# EAGLE board SmartLEDShield_V4 (EAGLE 7.7.0)
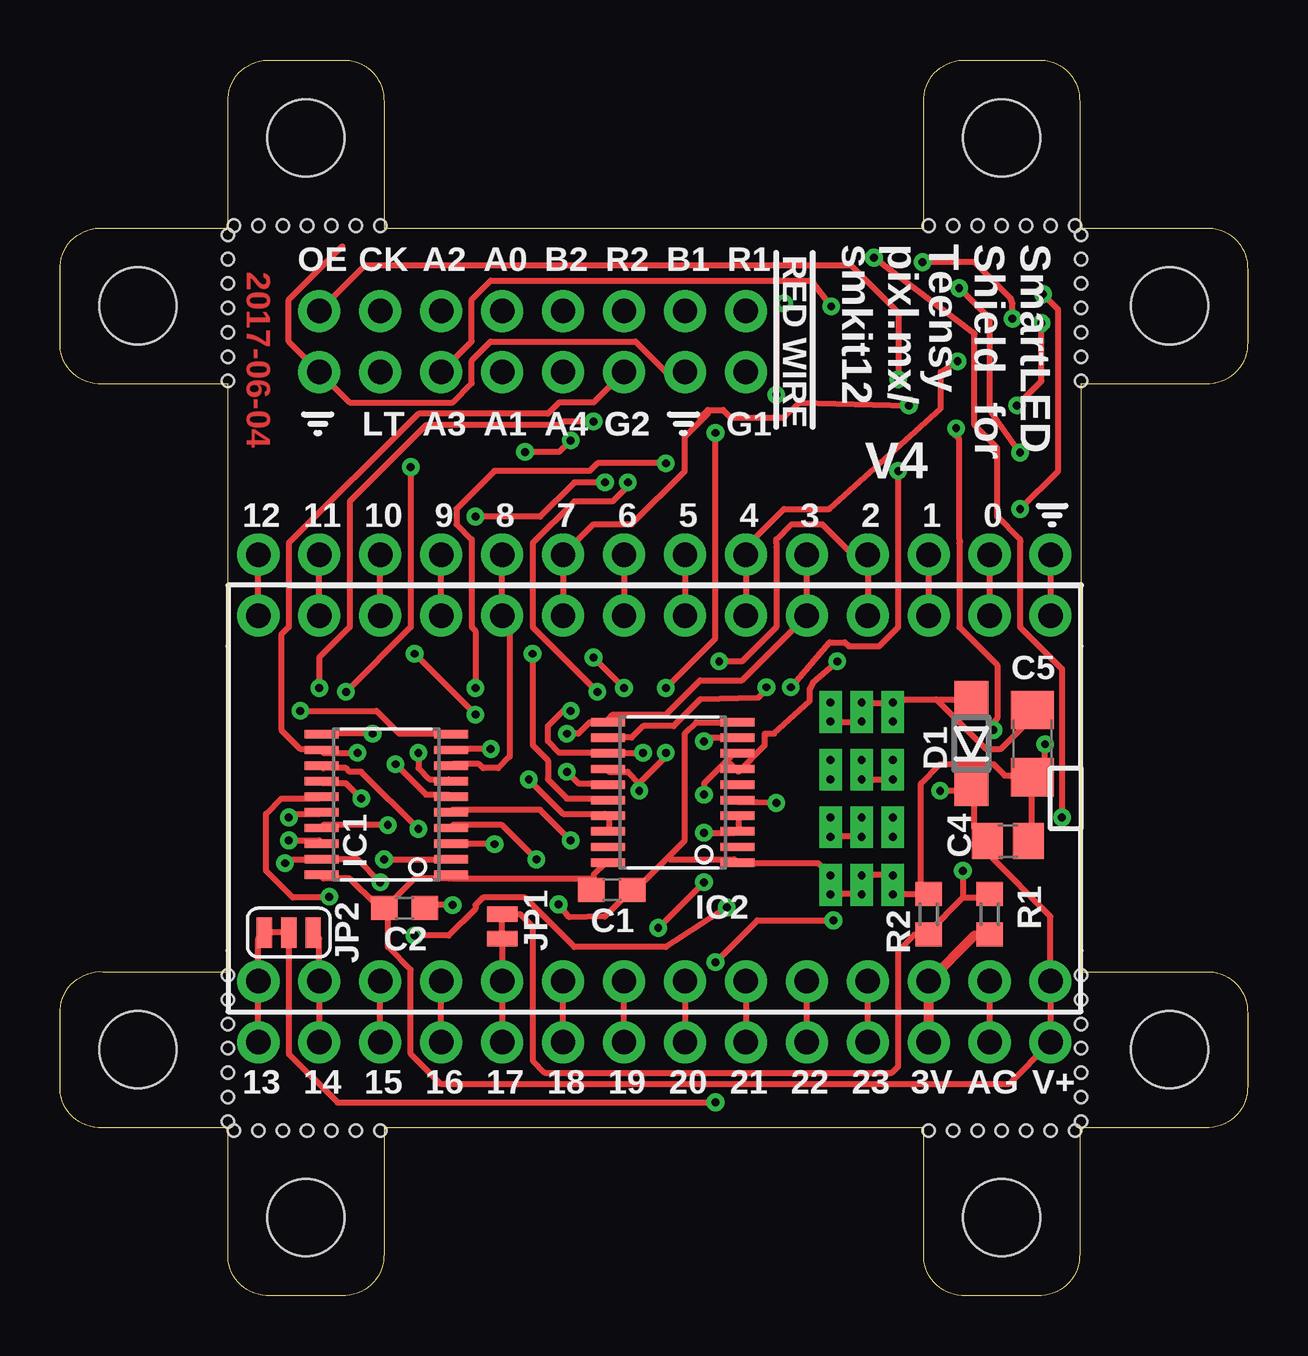
[diagram p0: board, top side]
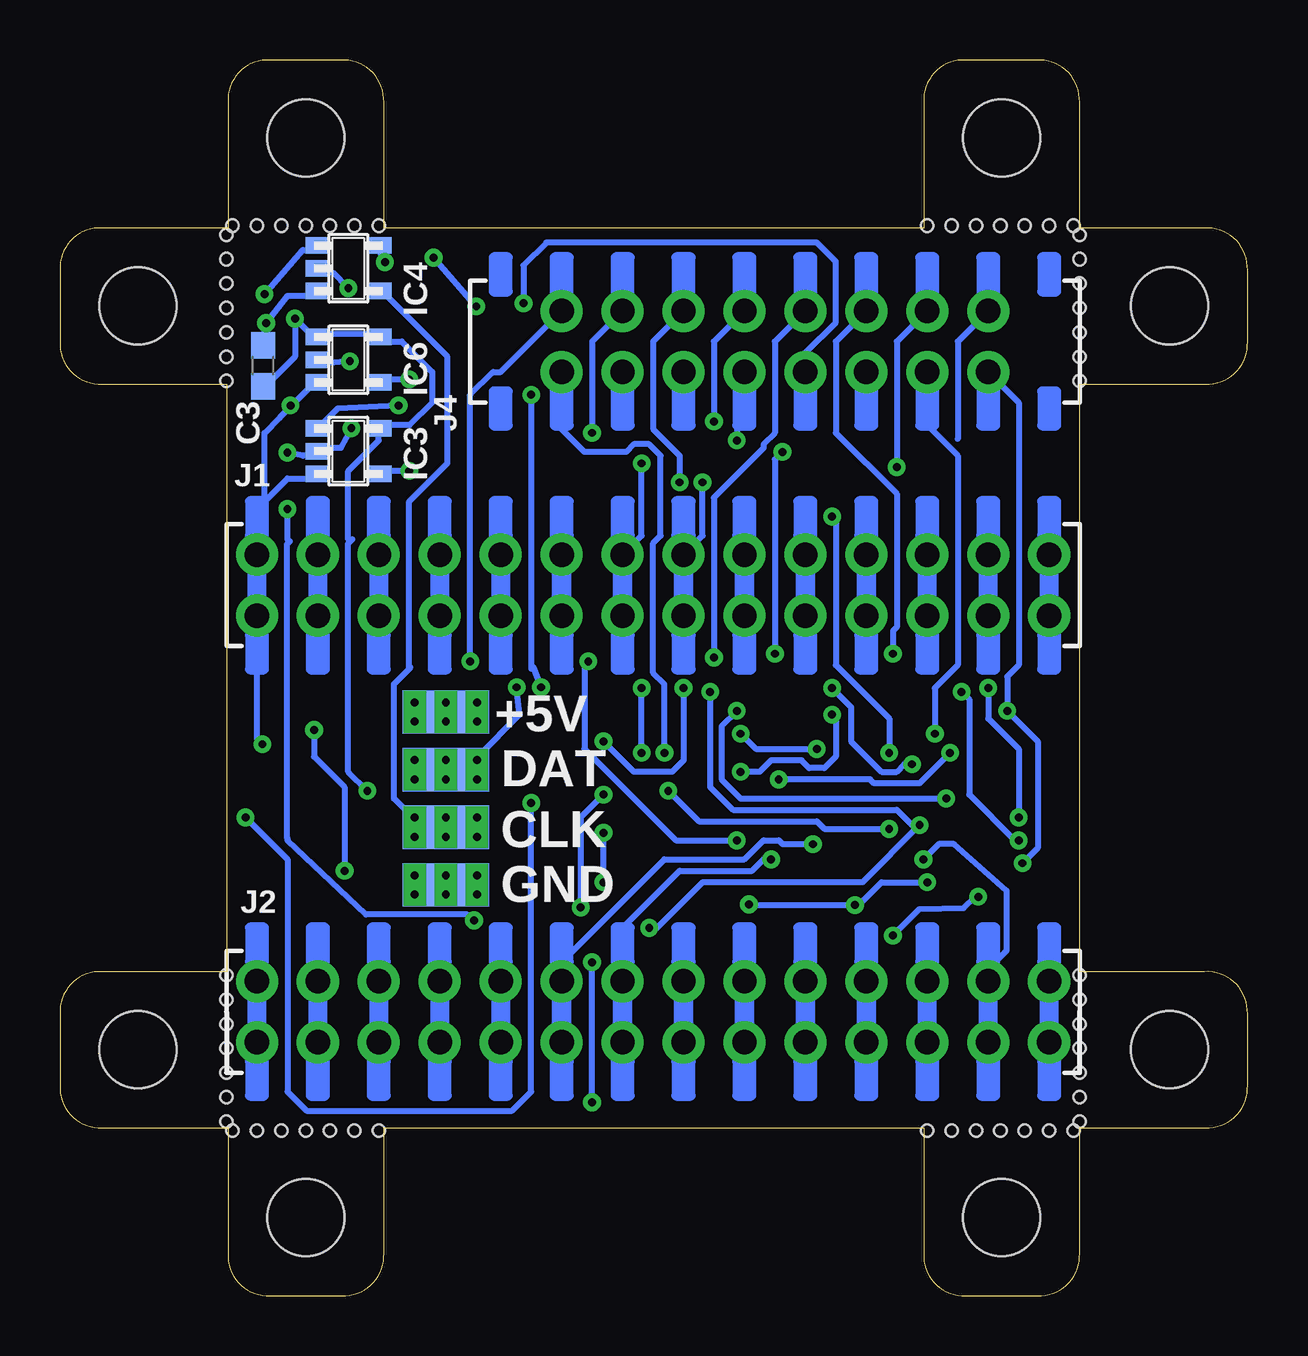
[diagram p1: board, bottom side, seen from below]

Size 49.5 x 51.5 mm. Coordinates in mm from the lower left corner, seen from the top.
Outline: 13.5,44.5 36,44.5 36,49.75 arc-95 37.8,51.5 40.75,51.5 arc-95 42.5,49.75 42.5,44.5 47.75,44.5 arc-95 49.5,42.75 49.5,39.75 arc-95 47.75,38 42.56,38 42.56,13.5 47.75,13.5 arc-95 49.5,11.75 49.5,8.75 arc-95 47.75,7 42.5,7 42.5,1.75 arc-95 40.75,0 37.75,0 arc-95 36,1.75 36,7 13.5,7 13.5,1.75 arc-95 11.75,0 8.75,0 arc-95 7,1.75 7,7 1.75,7 arc-95 0,8.75 0,11.75 arc-95 1.8,13.5 7,13.5 7,38 1.75,38 arc-95 0,39.75 0,42.75 arc-95 1.8,44.5 7,44.5 7,49.75 arc-95 8.8,51.5 11.75,51.5 arc-95 13.5,49.75 13.5,44.5
Copper layers (1*16): Top 0.0356mm / dielectric 1.5011mm / Bottom 0.0356mm
Design rules "OshParkMod-8mil-20150316": minimum track width 6mil, minimum drill 13mil, track to track 8mil, track to pad 8mil, pad to pad 8mil, via to via 8mil, smd to smd 8mil, copper to edge 15mil, drill to drill 6mil, minimum pad ring 12mil, minimum via ring 8mil, stop-mask expansion 3mil, vias tented up to drill 25mil, thermal gap 10mil
Net classes: 0 default: width 0.254 mm; 1 power: width 0.406 mm
Holes 0.51 mm at 42.56,44.22 42.56,43.2 42.56,42.18 42.56,41.17 42.56,40.15 42.56,39.13 42.56,38.12 36.21,44.6 37.23,44.6 38.24,44.6 39.26,44.6 40.27,44.6 41.29,44.6 42.31,44.6 7.25,44.6 8.27,44.6 9.29,44.6 10.3,44.6 11.32,44.6 12.33,44.6 13.35,44.6 7,38.12 7,39.13 7,40.15 7,41.17 7,42.18 7,43.2 7,44.22 7,7.26 7,8.27 7,9.29 7,10.31 7,11.32 7,12.34 7,13.35 13.35,6.88 12.33,6.88 11.32,6.88 10.3,6.88 9.29,6.88 8.27,6.88 7.25,6.88 42.31,6.88 41.29,6.88 40.27,6.88 39.26,6.88 38.24,6.88 37.23,6.88 36.21,6.88 42.56,13.35 42.56,12.34 42.56,11.32 42.56,10.31 42.56,9.29 42.56,8.27 42.56,7.26

## Footprints (pad centres in the part's own frame; a part is rotated, then mirrored left to right if it is on the bottom)
C0603 = smd 1.1 x 1: 1 -0.85,0; 2 0.85,0
C0805 = smd 1.3 x 1.5: 1 -0.85,0; 2 0.85,0
C1206 = smd 1.6 x 1.8: 1 -1.4,0; 2 1.4,0
SOD123 = smd 1.4 x 1.4: A 1.9,0; C -1.9,0
STAND-OFF-3MM = hole 3.2: 0,0
TSSOP-20 = smd 0.35 x 1.43: 1 -2.925,-2.7; 2 -2.275,-2.7; 3 -1.625,-2.7; 4 -0.975,-2.7; 5 -0.325,-2.7; 6 0.325,-2.7; 7 0.975,-2.7; 8 1.625,-2.7; 9 2.275,-2.7; 10 2.925,-2.7; 11 2.925,2.7; 12 2.275,2.7; 13 1.625,2.7; 14 0.975,2.7; 15 0.325,2.7; 16 -0.325,2.7; 17 -0.975,2.7; 18 -1.625,2.7; 19 -2.275,2.7; 20 -2.925,2.7
SOT23-5 = smd 0.69 x 0.99: 1 -0.95,-1.29; 2 0,-1.29; 3 0.95,-1.29; 4 0.95,1.3; 5 -0.95,1.3
TEENSY_DUAL_HEADER_BOT_MOUNT_LEFT = drill 1.016 pad 1.753: 0A 1.27,13.97; 0B -1.27,13.97; 1A 1.27,11.43; 1B -1.27,11.43; 2A 1.27,8.89; 2B -1.27,8.89; 3A 1.27,6.35; 3B -1.27,6.35; 4A 1.27,3.81; 4B -1.27,3.81; 5A 1.27,1.27; 5B -1.27,1.27; 6A 1.27,-1.27; 6B -1.27,-1.27; 7A 1.27,-3.81; 7B -1.27,-3.81; 8A 1.27,-6.35; 8B -1.27,-6.35; 9A 1.27,-8.89; 9B -1.27,-8.89; 10A 1.27,-11.43; 10B -1.27,-11.43; 11A 1.27,-13.97; 11B -1.27,-13.97; 12A 1.27,-16.51; 12B -1.27,-16.51; GNDA 1.27,16.51; GNDB -1.27,16.51
TEENSY_DUAL_HEADER_BOT_MOUNT_RIGHT = drill 1.016 pad 1.753: 3V3_A -1.27,11.43; 3V3_B 1.27,11.43; 13A -1.27,-16.51; 13B 1.27,-16.51; 14A -1.27,-13.97; 14B 1.27,-13.97; 15A -1.27,-11.43; 15B 1.27,-11.43; 16A -1.27,-8.89; 16B 1.27,-8.89; 17A -1.27,-6.35; 17B 1.27,-6.35; 18A -1.27,-3.81; 18B 1.27,-3.81; 19A -1.27,-1.27; 19B 1.27,-1.27; 20A -1.27,1.27; 20B 1.27,1.27; 21A -1.27,3.81; 21B 1.27,3.81; 22A -1.27,6.35; 22B 1.27,6.35; 23A -1.27,8.89; 23B 1.27,8.89; AGND_A -1.27,13.97; AGND_B 1.27,13.97; VIN_A -1.27,16.51; VIN_B 1.27,16.51
1X04SMDWIRES_NARROW = smd 1.8 x 3.6: 1 -3.6,0; 2 -1.2,0; 3 1.2,0; 4 3.6,0 | drill 0.33 pad 0.508 square: 1-1 -4,1.3; 1-2 -3.2,1.3; 1-3 -4,0; 1-4 -3.2,0; 1-5 -4,-1.3; 1-6 -3.2,-1.3; 2-1 -1.6,1.3; 2-2 -0.8,1.3; 2-3 -1.6,0; 2-4 -0.8,0; 2-5 -1.6,-1.3; 2-6 -0.8,-1.3; 3-1 0.8,1.3; 3-2 1.6,1.3; 3-3 0.8,0; 3-4 1.6,0; 3-5 0.8,-1.3; 3-6 1.6,-1.3; 4-1 3.2,1.3; 4-2 4,1.3; 4-3 3.2,0; 4-4 4,0; 4-5 3.2,-1.3; 4-6 4,-1.3
SMARTMATRIX_SSMTHT = drill 1.016 pad 1.753: 1 1.27,8.89; 2 -1.27,8.89; 3 1.27,6.35; 4 -1.27,6.35; 5 1.27,3.81; 6 -1.27,3.81; 7 1.27,1.27; 8 -1.27,1.27; 9 1.27,-1.27; 10 -1.27,-1.27; 11 1.27,-3.81; 12 -1.27,-3.81; 13 1.27,-6.35; 14 -1.27,-6.35; 15 1.27,-8.89; 16 -1.27,-8.89
SMT-JUMPER_2_NC_TRACE_NO-SILK = smd 0.635 x 1.27: 1 -0.508,0; 2 0.508,0
SMT-JUMPER_3_1-NC_TRACE_SILK = smd 0.635 x 1.27: 1 -1.016,0; 2 0,0; 3 1.016,0
R0603 = smd 1 x 1.1: 1 -0.85,0; 2 0.85,0

## Placement (x,y rotation side)
C1  0.1uF  [C0603]  23,16.91 0 top
C2  0.1uF  [C0603]  14.37,16.15 0 top
C3  0.1uF  [C0603]  41.04,38.75 90 bottom
C4  10uF  [C0805]  39.51,18.94 0 top
C5  100uF  [C1206]  40.53,23.01 270 top
D1  MBR0520LT  [SOD123]  37.99,23.01 90 top
H1  STAND-OFFSTAND-OFF-3MM  [STAND-OFF-3MM]  46.25,41.25 90 top
H2  STAND-OFFSTAND-OFF-3MM  [STAND-OFF-3MM]  39.25,48.25 90 top
H3  STAND-OFFSTAND-OFF-3MM  [STAND-OFF-3MM]  10.25,48.25 90 top
H4  STAND-OFFSTAND-OFF-3MM  [STAND-OFF-3MM]  3.25,41.25 180 top
H5  STAND-OFFSTAND-OFF-3MM  [STAND-OFF-3MM]  3.25,10.25 180 top
H6  STAND-OFFSTAND-OFF-3MM  [STAND-OFF-3MM]  10.25,3.25 270 top
H7  STAND-OFFSTAND-OFF-3MM  [STAND-OFF-3MM]  39.25,3.25 270 top
H9  STAND-OFFSTAND-OFF-3MM  [STAND-OFF-3MM]  46.25,10.25 0 top
IC1  74245PW  [TSSOP-20]  13.6,20.47 90 top
IC2  74374PW  [TSSOP-20]  25.54,20.97 90 top
IC3  74AHC1G08DBV  [SOT23-5]  37.48,35.2 270 bottom
IC4  74AHC1G08DBV  [SOT23-5]  37.48,42.82 270 bottom
IC5  74AHC1G08DBV  [SOT23-5]  37.48,39.01 270 bottom
J1  TEENSY_3.0_MIN_LEFT_BOT_MOUNT  [TEENSY_DUAL_HEADER_BOT_MOUNT_LEFT]  24.78,29.61 90 bottom
J2  TEENSY_3.0_MIN_RIGHT_BOT_MOUNT  [TEENSY_DUAL_HEADER_BOT_MOUNT_RIGHT]  24.78,11.83 90 bottom
J3  [1X04SMDWIRES_NARROW]  33.42,20.72 270 bottom
J4  [SMARTMATRIX_SSMTHT]  19.7,39.77 90 bottom
JP1  JUMPER-SMT_2_NC_TRACE_NO-SILK  [SMT-JUMPER_2_NC_TRACE_NO-SILK]  18.43,15.39 90 top
JP2  JUMPER-SMT_3_1-NC_TRACE_SILK  [SMT-JUMPER_3_1-NC_TRACE_SILK]  9.54,15.13 180 top
R1  47k-DNP  [R0603]  38.75,15.89 90 top
R2  47k  [R0603]  36.21,15.89 90 top

## Library data of the parts
C1-C5 = scanlime; PARTNO: CAP CER 0.1UF 10V 10% X7R 0805
D1 = diode
H1-H7 H9 IC1 IC2 J1-J4 = eclibrary
IC3-IC5 = 74xx-little-us
JP1 JP2 = SparkFun-Jumpers
R1 R2 = rcl

## Nets
3V3 [power]: J2.3V3_A J2.3V3_B R1.1
7/SPI_MOSI: IC3.1 J1.7A J1.7B
13/SPI_SCK: J2.13A J2.13B JP2.3
APA_CLK: IC4.1 JP2.2
BUFFER_B1: IC1.7 J1.6A J1.6B
BUFFER_B2: IC1.4 J2.20A J2.20B
BUFFER_CLK: IC1.2 J2.14A J2.14B JP2.1
BUFFER_G1: IC1.6 J1.5A J1.5B
BUFFER_G2: IC1.8 J1.8A J1.8B
BUFFER_LATCH: IC1.9 IC2.11 J1.3A J1.3B
BUFFER_OE: IC5.2 J1.4A J1.4B
BUFFER_R1: IC1.5 J1.2A J1.2B
BUFFER_R2: IC1.3 J2.21A J2.21B
CLK1: IC4.4 J3.3 J3.3-1 J3.3-2 J3.3-3 J3.3-4 J3.3-5 J3.3-6
DAT1: IC3.4 J3.2 J3.2-1 J3.2-2 J3.2-3 J3.2-4 J3.2-5 J3.2-6
GND: C1.2 C2.2 C3.2 C4.2 C5.2 IC1.10 IC1.19 IC2.1 IC2.10 IC3.3 IC4.3 IC5.3 J1.GNDA J1.GNDB J3.4 J3.4-1 J3.4-2 J3.4-3 J3.4-4 J3.4-5 J3.4-6 J4.4 J4.16 R2.2
LED_EN: J2.17A J2.17B JP1.1
N$1: J1.0A J1.0B
N$2: J1.9A J1.9B
N$3: J1.10A J1.10B
N$4: IC3.2 IC4.2 JP1.2 R1.2 R2.1
N$5: J1.1A J1.1B
N$6: J2.AGND_A J2.AGND_B
N$7: J2.19A J2.19B
N$8: J2.22A J2.22B
N$9: J2.18A J2.18B
N$10: J2.23A J2.23B
N$11: J2.16A J2.16B
N$12: J2.15A J2.15B
N$13: J1.12A J1.12B
N$14: J1.11A J1.11B
PANEL_ADX0: IC2.9 J4.9
PANEL_ADX1: IC2.12 J4.10
PANEL_ADX2: IC2.15 J4.11
PANEL_ADX3: IC2.5 J4.12
PANEL_ADX4: IC2.16 J4.8
PANEL_B1: IC1.13 IC2.14 J4.3
PANEL_B2: IC1.16 J4.7
PANEL_CLK: IC1.18 J4.13
PANEL_G1: IC1.14 IC2.13 J4.2
PANEL_G2: IC1.12 IC2.17 IC2.18 J4.6
PANEL_LATCH: IC1.11 J4.14
PANEL_OE: IC5.4 J4.15
PANEL_R1: IC1.15 IC2.7 IC2.8 J4.1
PANEL_R2: IC1.17 IC2.3 IC2.4 J4.5
VEXT: C5.1 D1.A J3.1 J3.1-1 J3.1-2 J3.1-3 J3.1-4 J3.1-5 J3.1-6
VIN: C1.1 C2.1 C3.1 C4.1 D1.C IC1.1 IC1.20 IC2.20 IC3.5 IC4.5 IC5.1 IC5.5 J2.VIN_A J2.VIN_B

## Tracks (layer width: path | path; a pad name or v marks a point on that pad's centre or on a via)
3V3
  Top 0.406: R1.1 38.75,15.01 38.11,15.01 J2.3V3_B J2.3V3_A
7/SPI_MOSI  (via drill 0.33)
  Top 0.254: 26.76,36.52 26.05,35.8 26.05,34.37 23.83,32.15 22.24,32.15 J1.7A J1.7B | 26.76,36.52 27,36.75 | v35.38,37.1 30.81,37.23 30.18,36.59 27.95,36.59 27.64,36.91 27,36.91 26.68,36.59 26.76,36.52
  Bottom 0.254: v35.38,37.1 37.92,36.98 38.62,36.28 38.75,36.28 IC3.1
13/SPI_SCK
  Top 0.254: J2.13A J2.13B 8.27,14.88 JP2.3
APA_CLK  (via drill 0.33)
  Top 0.254: v32.24,15.64 29.07,15.64 v27.32,13.89 | v27.32,8.05 11.57,8.05 9.54,10.08 9.54,14.53 9.55,15.05 9.54,15.06 JP2.2 | v40.97,41.74 41.61,41.1 41.61,34.37 v40.02,32.78
  Bottom 0.254: v32.24,15.64 32.21,15.51 32.53,15.88 36.75,15.88 40.02,18.97 40.03,19.09 40.03,31.32 39.93,31.43 | v27.32,8.05 v27.32,13.89 | 39.93,31.43 39.92,31.44 | v40.97,41.74 39.38,43.58 39.07,43.58 IC4.1 | v40.02,32.78 40.02,31.52 39.93,31.43
BUFFER_B1  (via drill 0.33)
  Top 0.254: v14.94,22.62 14.94,21.99 15.41,21.51 16.21,21.51 IC1.7 | v17.32,32.47 20.02,32.47 21.45,33.9 v22.72,33.9 | J1.6A J1.6B
  Bottom 0.254: v14.94,22.62 14.94,24.05 17.16,26.28 17.16,32.31 v17.32,32.47 | v22.72,33.9 22.72,31.67 J1.6A
BUFFER_B2  (via drill 0.33)
  Top 0.254: v19.86,18.18 18.43,19.61 16.37,19.61 IC1.4 | J2.20B J2.20A
  Bottom 0.254: v19.86,18.18 20.18,18.18 20.65,17.7 23.67,17.7 26.05,15.32 J2.20B
BUFFER_CLK  (via drill 0.33)
  Top 0.254: J2.14A J2.14B 10.81,14.88 JP2.1 | v13.51,18.18 16.21,18.18 IC1.2
  Bottom 0.254: v13.51,18.18 12.87,18.81 12.24,18.81 10.05,16.88 10.05,14.37 10.81,13.61 J2.14B
BUFFER_G1  (via drill 0.33)
  Top 0.254: v13.98,22.15 15.26,20.88 16.21,20.88 IC1.6 | v17.32,25.32 17.32,27.7 17.16,27.86 17.16,31.52 16.52,32.15 16.52,32.78 18.11,34.37 22.08,34.37 22.4,34.69 v25.26,34.69 | J1.5A J1.5B
  Bottom 0.254: v13.98,22.15 14.3,22.15 14.62,21.83 15.26,21.83 16.52,23.1 16.52,24.53 v17.32,25.32 | v25.26,34.69 25.26,31.67 J1.5A
BUFFER_G2
  Top 0.254: IC1.8 16.37,22.15 17.48,22.15 17.64,21.99 18.27,21.99 18.75,22.47 18.75,28.02 J1.8B J1.8A
BUFFER_LATCH  (via drill 0.33)
  Top 0.254: J1.3A J1.3B 28.43,25.64 26.68,25.64 25.26,24.21 23.03,24.21 22.88,24.05 IC2.11 22.72,23.89 22.08,23.89 21.61,23.42 v21.13,23.42 | v17.95,22.78 16.37,22.78 IC1.9
  Bottom 0.254: v17.95,22.78 20.49,22.78 v21.13,23.42
BUFFER_OE  (via drill 0.33)
  Top 0.254: J1.4B J1.4A 28.59,31.2 30.18,32.78 32.08,32.78 36.72,36.98 36.72,38.5 37.48,39.01 v37.42,38.94
  Bottom 0.254: v37.42,38.94 38.75,38.82 IC5.2
BUFFER_R1  (via drill 0.33)
  Top 0.254: v21.29,18.97 20.02,20.24 16.37,20.24 IC1.5 | v27.48,26.43 28.43,26.43 29.86,27.86 29.86,31.2 29.86,31.36 29.86,31.52 30.5,32.15 31.77,32.15 33.03,30.88 J1.2A J1.2B
  Bottom 0.254: v21.29,18.97 23.83,18.97 27.64,22.78 27.64,26.28 v27.48,26.43
BUFFER_R2  (via drill 0.33)
  Top 0.254: v18.11,18.81 16.37,18.81 IC1.3 | J2.21B J2.21A
  Bottom 0.254: v18.11,18.81 19.38,18.81 19.54,18.97 20.18,18.97 20.97,18.18 24.3,18.18 28.59,13.89 J2.21B
CLK1
  Top 0.254: J3.3-6 34.78,19.13 34.78,19.77 J3.3-5 | 32.24,19.13 32.24,19.77 J3.3-1 | 32.24,19.13 33.35,19.13 J3.3-4 | 32.24,19.13 J3.3-2
  Bottom 0.254: 34.94,26.12 35.58,25.48 35.58,20.72 34.78,19.93 | J3.3-4 33.51,19.13 33.51,19.45 J3.3 | J3.3-3 33.51,19.77 33.51,19.61 J3.3 | 34.78,19.93 J3.3-5 | 34.78,19.93 J3.3 | 34.89,26.18 34.94,26.12 | 34.94,26.12 34.94,33.1 33.35,34.69 33.35,39.13 35.89,41.67 IC4.4
DAT1  (via drill 0.33)
  Top 0.254: J3.2-5 34.78,22.31 34.78,21.67 J3.2-6 34.62,21.51 33.51,21.51 J3.2-4 | J3.2-2 32.24,21.67 32.24,22.31 J3.2-1 | v34.94,34.37 34.94,27.86 34.15,27.07 32.88,27.07 32.72,27.23 32.08,27.23 v30.46,25.36
  Bottom 0.254: v30.46,25.36 30.34,24.21 32.08,22.47 J3.2 | J3.2-4 33.51,21.67 33.51,21.83 J3.2 | J3.2-3 33.51,22.31 33.51,21.99 J3.2 | J3.2-1 32.24,22.31 J3.2 | v34.94,34.37 35.89,34.37 IC3.4
GND  (via drill 0.33)
  Top 0.254: 32.24,16.75 32.24,17.39 J3.4-1 32.08,17.55 31.61,18.02 28.27,18.02 IC2.1 28.11,18.18 25.41,18.18 25.34,18.26 | C4.2 40.5,18.97 40.5,21.51 C5.2 | 34.78,16.75 35.89,16.75 | 35.89,16.75 R2.2 35.89,16.75 | 34.78,16.75 34.78,17.39 J3.4-5 34.62,17.55 33.51,17.55 J3.4-3 | 34.78,16.75 J3.4-6 | 35.89,16.75 35.89,21.36 36.69,22.15 38.91,22.15 39.38,21.67 40.5,21.67 C5.2 | 32.24,16.75 33.35,16.75 J3.4-4 | 32.24,16.75 J3.4-2 | v16.37,16.27 15.26,16.27 C2.2 | v20.78,16.31 20.81,16.31 21.22,15.77 22.72,15.8 23.83,16.91 C1.2 23.99,16.91 25.34,18.26 | v13.35,17.23 12.4,18.18 10.97,18.18 IC1.19 10.81,18.18 9.54,18.18 v9.38,18.02 | 25.34,18.26 26.05,18.97 26.05,23.42 26.53,23.89 28.11,23.89 IC2.10 | 41.45,31.04 J1.GNDA J1.GNDB | v10.02,24.37 13.19,24.37 14.14,23.42 16.21,23.42 IC1.10 | J4.4 25.26,38.5 23.99,39.77 17.95,39.77 17.16,38.98 17.16,38.02 16.37,37.23 12.08,37.23 J4.16 9.54,39.77 9.54,41.52 11.76,43.74 | v41.06,22.98 41.06,22.18 40.6,21.72 C5.2 | v39.89,37.1 40.91,38.12 v40.91,40.53
  Bottom 0.254: J3.4-4 33.51,16.75 33.51,17.07 J3.4 33.51,17.23 33.51,17.39 J3.4-3 | v20.78,16.31 20.56,16.27 v16.37,16.27 16.21,16.27 15.26,17.23 v13.35,17.23 | J4.16 9.54,37.23 9.54,26.28 10.02,25.8 v10.02,24.37 8.75,23.1 8.75,18.66 v9.38,18.02 | J1.GNDB 41.29,23.21 v41.06,22.98 | IC4.3 39.07,41.67 40.02,41.67 v40.91,40.53 40.97,40.34 40.97,39.77 C3.2 | 40.97,33.1 41.29,32.78 J1.GNDA | 40.97,33.1 40.02,34.05 39.07,34.05 IC3.3 | 40.34,36.59 40.97,35.96 40.97,33.1 | 40.34,36.59 39.07,37.86 38.96,37.86 IC5.3 | 40.34,36.59 v39.89,37.1
LED_EN
  Top 0.254: JP1.1 J2.17B J2.17A
N$1
  Top 0.254: J1.0B J1.0A
N$2
  Top 0.254: J1.9B J1.9A
N$3
  Top 0.254: J1.10B J1.10A
N$4  (via drill 0.33)
  Top 0.254: 18.43,14.88 JP1.2 19.19,15.89 19.7,15.39 19.7,9.8 20.21,9.29 34.69,9.29 34.94,9.54 34.94,14.37 35.61,15.04 R2.1 36.21,15.16 37.64,16.59 | 37.64,16.59 38.75,16.59 R1.2 | v37.64,17.7 37.64,16.59 | v38.91,23.58 38.91,23.89 39.07,24.05 39.07,26.28 37.48,27.86 37.48,31.36 37.52,31.44 37.48,31.52 37.48,35.71 37.23,35.96 v37.35,36.15 | v37.48,41.99 38.75,40.72 38.75,36.91 v40.02,35.13
  Bottom 0.254: v37.64,17.7 37.64,21.2 38.91,22.47 v38.91,23.58 | v37.35,36.15 37.8,35.33 38.75,35.33 IC3.2 39.07,35.01 39.38,35.01 v40.02,35.13 | v37.48,41.99 38.11,42.63 38.75,42.63 IC4.2
N$5
  Top 0.254: J1.1B J1.1A
N$6
  Top 0.254: J2.AGND_A J2.AGND_B
N$7
  Top 0.254: J2.19A J2.19B
N$8
  Top 0.254: J2.22A J2.22B
N$9
  Top 0.254: J2.18A J2.18B
N$10
  Top 0.254: J2.23A J2.23B
N$11
  Top 0.254: J2.16A J2.16B
N$12
  Top 0.254: J2.15A J2.15B
N$13
  Top 0.254: J1.12B J1.12A
N$14
  Top 0.254: J1.11B J1.11A
PANEL_ADX0  (via drill 0.33)
  Top 0.254: v26.84,23.1 27,23.26 28.11,23.26 IC2.9 | v22.24,26.59 v23.51,25.32
  Bottom 0.254: J4.9 19.7,39.77 19.7,35.96 20.18,35.48 20.18,35.33 22.24,33.26 v22.24,26.59 | v26.84,23.1 25.57,21.83 23.99,21.83 23.51,22.31 v23.51,25.32
PANEL_ADX1  (via drill 0.33)
  Top 0.254: v29.45,25.36 29.32,25.13 29.1,24.91 26.68,24.85 25.57,23.74 24.3,23.74 23.83,23.26 22.88,23.26 IC2.12 | v29.86,37.55 29.86,41.04 v30.18,41.36
  Bottom 0.254: 29.86,26.28 29.78,26.2 | 29.78,26.2 v29.45,25.36 | J4.10 18.43,39.29 17.16,40.56 17.16,43.1 17.95,43.9 29.23,43.9 30.18,42.95 v30.18,41.36 | v29.86,37.55 29.86,26.12 29.78,26.2
PANEL_ADX2  (via drill 0.33)
  Top 0.254: v21.13,21.83 21.61,21.36 22.72,21.36 IC2.15 | v14.78,26.75 v17.32,24.21
  Bottom 0.254: J4.11 17.16,39.77 17.16,35.96 14.62,33.42 14.62,27.86 14.78,27.7 v14.78,26.75 | v21.13,21.83 20.34,21.83 19.86,22.31 18.59,22.31 18.27,21.99 17.64,21.99 17.16,22.47 17.16,24.05 v17.32,24.21
PANEL_ADX3  (via drill 0.33)
  Top 0.254: v29.86,20.53 29.07,20.56 28.27,20.56 IC2.5 | v41.77,19.93 41.77,26.12 40.02,27.86 40.03,27.89 40.03,31.44 40.02,31.52 39.07,32.47 39.07,35.33 38.11,36.28 38.11,40.09 v33.92,43.26 | J4.12 17.16,39.77 17.16,41.52 17.95,42.31 31.32,42.31 v32.15,41.23
  Bottom 0.254: v29.86,20.53 29.86,8.5 30.65,7.7 39.23,7.7 40.02,8.5 40.02,18.18 v41.77,19.93 | v33.92,43.26 v32.15,41.23
PANEL_ADX4  (via drill 0.33)
  Top 0.254: v19.7,26.75 19.7,22.94 20.34,22.31 20.34,21.51 21.13,20.72 22.72,20.72 IC2.16 | v19.38,35.17 20.81,35.17 v21.29,35.64
  Bottom 0.254: v19.7,26.75 19.7,34.85 v19.38,35.17 | v21.29,35.64 21.29,38.18 J4.8
PANEL_B1  (via drill 0.33)
  Top 0.254: v14.94,19.45 12.56,21.83 12.08,21.83 11.92,21.99 10.97,21.99 IC1.13 | 24.14,21.36 23.67,21.83 22.88,21.83 IC2.14 | v27.32,35.96 27.32,27.39 v25.26,25.32 | v25.26,22.62 25.26,22.47 24.14,21.36 | 24.14,21.36 v24.14,21.04
  Bottom 0.254: J4.3 27.32,39.77 v27.32,35.96 | v14.94,19.45 17.64,19.45 17.95,19.77 22.88,19.77 v24.14,21.04 | v25.26,22.62 v25.26,25.32
PANEL_B2  (via drill 0.33)
  Top 0.254: v9.54,19.93 9.7,20.09 10.81,20.09 IC1.16 | v10.81,25.32 10.81,26.59 12.08,27.86 12.08,33.1 15.26,36.28 20.81,36.28 20.97,36.44 v22.24,36.44
  Bottom 0.254: J4.7 22.24,39.77 v22.24,36.44 22.24,36.21 | v9.54,19.93 9.54,22.78 10.81,24.05 v10.81,25.32
PANEL_CLK  (via drill 0.33)
  Top 0.254: v9.54,18.97 10.81,18.97 IC1.18 | v11.92,25.16 14.62,27.86 v14.62,34.53
  Bottom 0.254: J4.13 14.62,39.77 v14.62,34.53 | v9.54,18.97 9.7,18.97 11.6,20.88 11.6,24.85 v11.92,25.16
PANEL_G1  (via drill 0.33)
  Top 0.254: v12.56,20.72 11.92,21.36 10.97,21.36 IC1.14 | v21.29,24.37 20.97,24.37 20.34,23.74 20.34,23.1 20.81,22.62 22.72,22.62 IC2.13 22.88,22.62 v24.3,22.62
  Bottom 0.254: v12.56,20.72 21.13,20.72 21.92,21.51 21.92,23.74 v21.29,24.37 | J4.2 28.59,36.12 27.64,35.17 25.89,35.17 25.57,35.48 24.94,35.48 24.46,35.01 24.46,31.67 24.78,31.36 24.78,25.96 24.3,25.48 v24.3,22.62
PANEL_G2  (via drill 0.33)
  Top 0.254: IC2.18 22.88,19.45 22.88,19.93 IC2.17 22.72,20.09 20.97,20.09 v19.54,21.51 | J4.6 22.24,37.23 20.81,37.23 20.34,36.75 14.94,36.75 9.54,31.36 9.54,27.86 9.22,27.55 9.22,23.58 10.02,22.78 10.81,22.78 IC1.12 10.97,22.62 v12.4,22.62
  Bottom 0.254: v19.54,21.51 15.73,21.51 15.57,21.36 13.67,21.36 v12.4,22.62
PANEL_LATCH  (via drill 0.33)
  Top 0.254: v13.03,23.42 10.97,23.42 IC1.11
  Bottom 0.254: v13.03,23.42 13.03,25.32 12.08,26.28 12.08,35.01 13.35,36.28 J4.14
PANEL_OE  (via drill 0.33)
  Top 0.254: J4.15 12.71,42.95 32.97,42.95 34.94,40.98 v34.94,38.18
  Bottom 0.254: J4.15 12.08,39.77 12.08,35.71 | v34.94,38.18 35.89,38.18 IC5.4
PANEL_R1  (via drill 0.33)
  Top 0.254: v11.22,16.62 11,16.59 9.7,16.59 8.59,17.7 8.59,20.09 9.22,20.72 10.81,20.72 IC1.15 | v14.78,15.01 16.21,15.01 17.32,16.12 17.32,16.27 17.64,16.59 19.38,16.59 21.45,14.53 25.26,14.53 v27.8,16.18 | v26.84,20.88 26.84,21.36 27.8,22.31 | 27.8,22.31 28.11,22.62 IC2.8 | 27.8,22.31 28.11,21.99 IC2.7 28.27,21.83 29.38,22.94 29.38,23.42 29.77,23.42 31.26,24.78 31.26,25.29 31.38,25.55 v32.4,26.43
  Bottom 0.254: v11.22,16.62 11.35,16.62 11.83,16.15 13.67,16.12 v14.78,15.01 | v27.8,16.18 27.8,19.93 v26.84,20.88 | 32.38,26.52 v32.4,26.43 32.4,37.55 31.45,38.5 31.13,38.5 J4.1
PANEL_R2  (via drill 0.33)
  Top 0.254: IC2.4 28.27,19.93 28.27,19.45 IC2.3 28.11,19.29 v26.84,19.29 | v13.67,19.61 10.97,19.61 IC1.17 | v22.4,25.16 19.7,27.86 19.7,31.36 21.45,33.1 23.03,33.1 23.67,33.74 v23.67,33.9 | v24.94,15.32 v26.84,17.23
  Bottom 0.254: J4.5 24.78,39.77 24.78,36.12 23.67,35.01 v23.67,33.9 | v22.4,25.16 22.4,21.2 21.45,20.24 14.62,20.24 13.98,19.61 v13.67,19.61 16.05,17.23 22.72,17.23 24.62,15.32 v24.94,15.32 | v26.84,17.23 v26.84,19.29
VEXT
  Top 0.254: J3.1-1 32.24,24.69 32.24,24.05 J3.1-2 32.24,23.89 33.35,23.89 J3.1-4 | 36.53,24.85 34.78,24.85 J3.1-5 | 36.53,24.85 37.96,24.85 D1.A | 36.53,24.85 38.59,22.78 39.23,22.78 40.5,24.05 40.5,24.37 C5.1 | J3.1-6 34.78,24.05 34.78,24.69 J3.1-5 | J3.1-3 33.51,24.69 34.62,24.69 J3.1-5
  Bottom 0.254: J3.1 33.51,24.21 33.51,24.05 J3.1-4 33.51,24.37 33.51,24.69 J3.1-3
VIN  (via drill 0.33)
  Top 0.254: 22.24,17.39 22.24,17.55 22.72,18.02 IC2.20 | 22.24,17.39 22.24,16.91 C1.1 22.24,17.39 | C2.1 13.67,16.27 14.78,17.39 16.21,17.39 IC1.1 16.37,17.39 22.24,17.39 | IC1.20 10.97,17.39 12.08,17.39 13.19,16.27 13.51,16.27 C2.1 | v36.69,21.04 37.96,21.04 D1.C 38.11,21.04 38.11,19.45 38.59,18.97 C4.1 38.75,18.81 38.75,18.34 41.29,15.8 J2.VIN_B J2.VIN_A 39.54,8.81 15.89,8.81 14.62,10.08 14.62,13.58 13.67,14.53 13.67,16.12 C2.1 | v35.96,43.07 38.11,43.07 39.64,41.55 39.7,41.36 v39.7,40.72
  Bottom 0.254: 37.4,31.44 37.48,31.36 37.48,21.83 v36.69,21.04 | 37.4,31.44 37.32,31.52 | 37.4,31.44 37.48,31.52 37.48,34.37 36.21,35.64 36.21,35.96 IC3.5 35.89,36.28 34.94,36.28 33.99,37.23 33.99,38.5 35.26,39.77 35.99,39.77 IC5.5 36.21,39.99 36.21,40.09 38.75,40.09 IC5.1 39.07,40.09 v39.7,40.72 39.7,39.13 40.66,38.18 40.97,38.18 C3.1 | v35.96,43.07 36.21,43.58 IC4.5

## Text on the board
Top: 2017-06-04
tPlace: pixl.mx/ / smkit12 | SmartLED / Shield / Teensy | OE | CK | A2 | A0 | B2 | R2 | B1 | R1 | RED WIRE | for | LT | A3 | A1 | A4 | G2 | G2 | G1 | V4 | 12 | 11 | 10 | 9 | 8 | 7 | 6 | 5 | 4 | 3 | 2 | 1 | 0 | 13 | 14 | 15 | 16 | 17 | 18 | 19 | 20 | 21 | 22 | 23 | 3V | AG | V+
bPlace: IC4 | IC6 | IC3 | +5V | DAT | CLK | GND
Document: SmartLED Shield for Teensy | Rev V4 | Pixelmatix 2017 CC BY-SA